# Altium PCB PCB_BLDC421232.PcbDoc
Units mm, origin at the board's own origin, x right, y up, seen from the top; angles counter-clockwise.
Board outline 115 x 85 mm, 2 copper layers (Top Layer, Bottom Layer), stack 1.671 mm thick; 81 components, 58 nets, 315 pads, 560 vias.
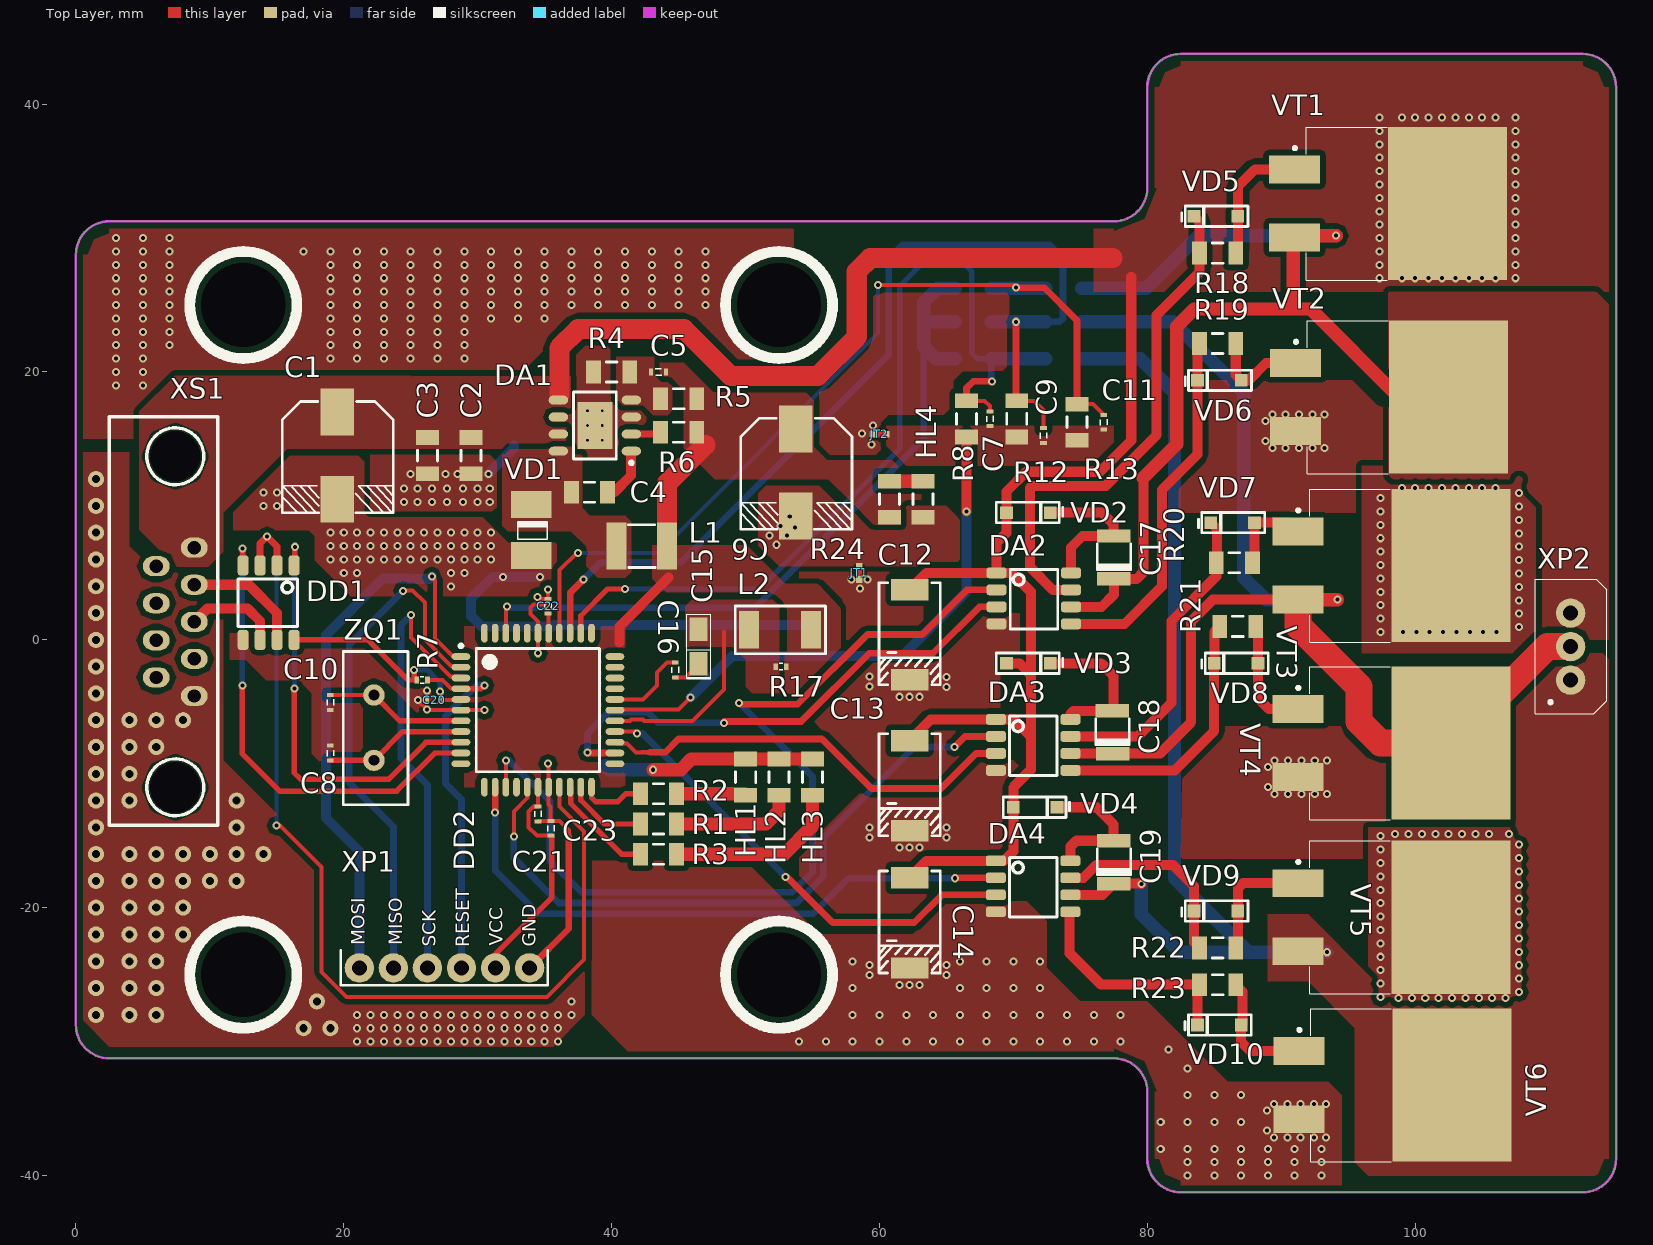
[diagram p0: Top Layer view]
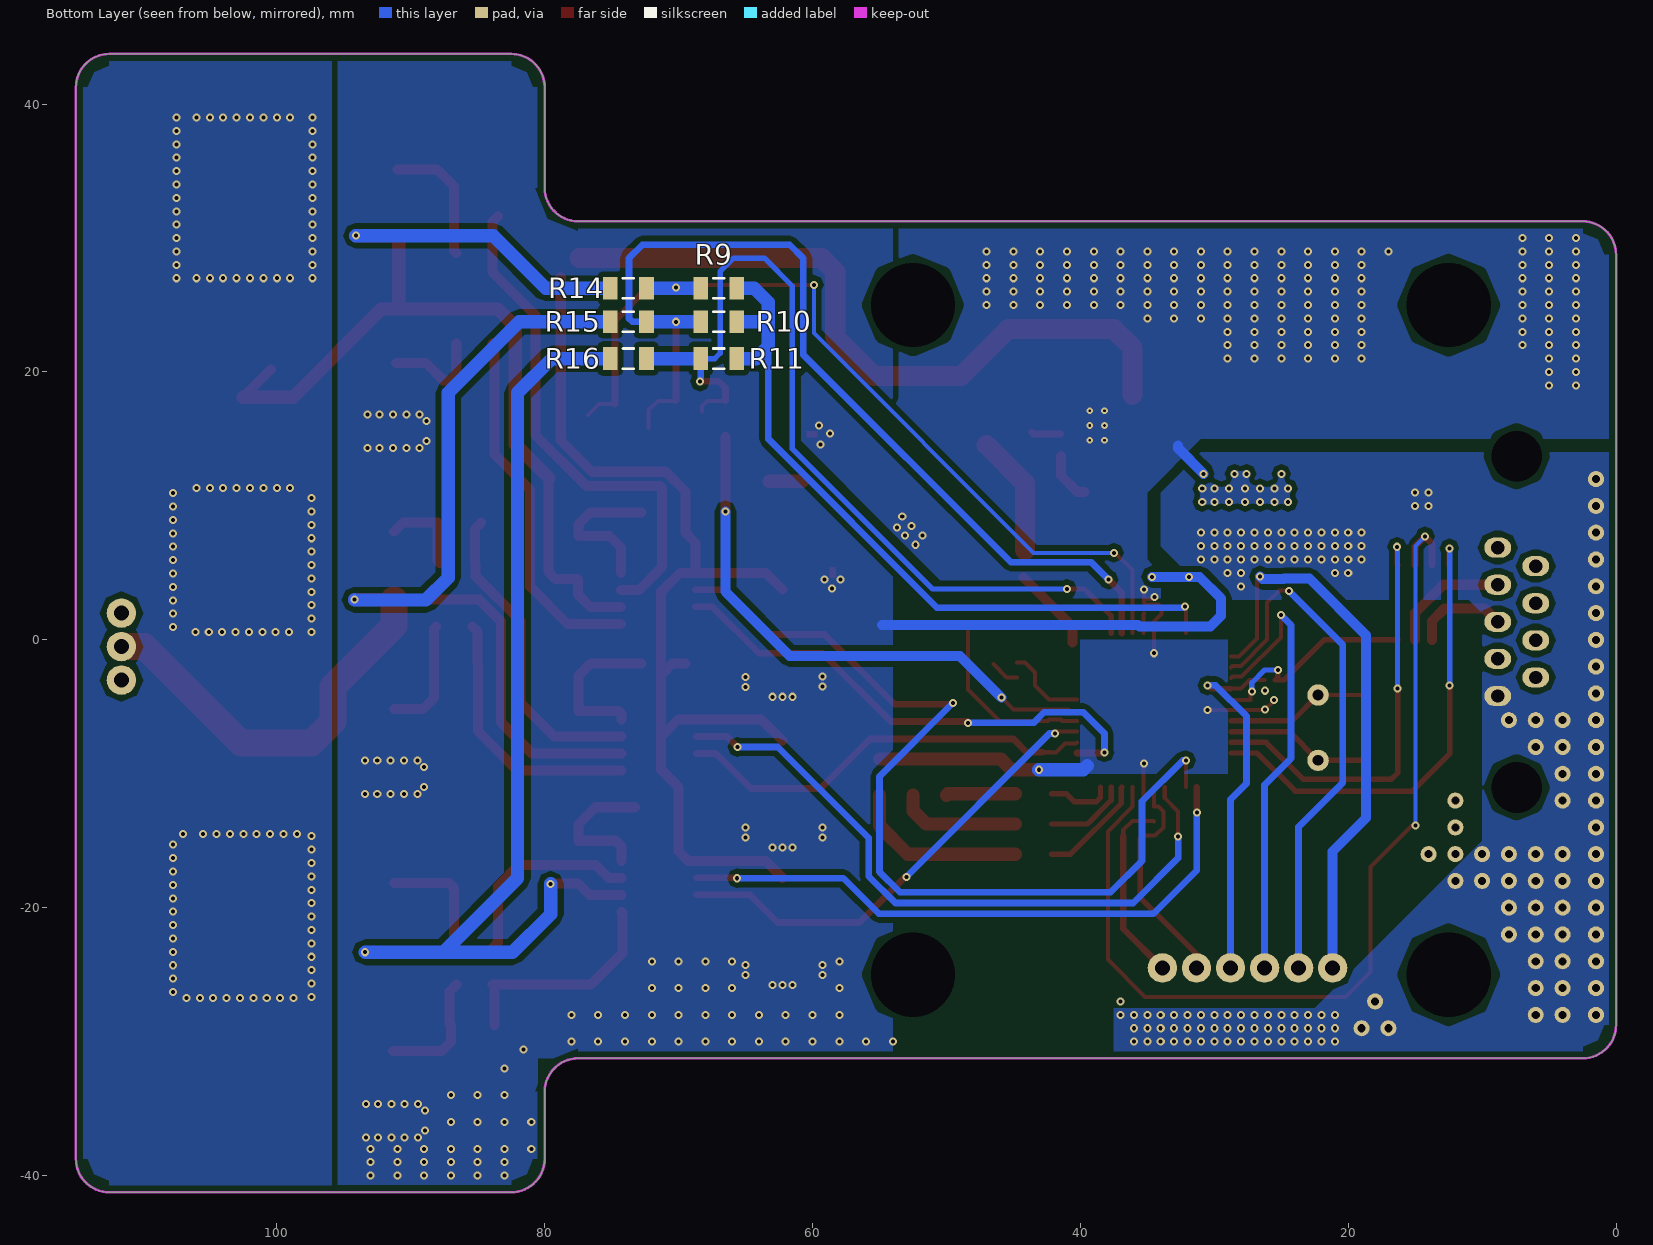
[diagram p1: Bottom Layer view, seen from below]

## Layer stack, top to bottom
Top Solder: solder mask 0.0102, Solder Resist, Dk 3.5
Top Layer: signal copper 0.0356
Dielectric 1: dielectric 1.6, FR-4, Dk 4.8
Bottom Layer: signal copper 0.0356
Bottom Solder: solder mask 0.0102, Solder Resist, Dk 3.5

## Board outline
2.5,-31.25 cw(c2.5,-28.75) 0,-28.75 0,28.75 cw(c2.5,28.75) 2.5,31.25 77.5,31.25 ccw(c77.5,33.75) 80,33.75 80,41.25 cw(c82.5,41.25) 82.5,43.75 112.5,43.75 cw(c112.5,41.25) 115,41.25 115,-38.75 cw(c112.5,-38.75) 112.5,-41.25 82.5,-41.25 cw(c82.5,-38.75) 80,-38.75 80,-33.75 ccw(c77.5,-33.75) 77.5,-31.25

## Design rules (kind name [scope] priority, off if disabled: settings)
Clearance [All] p1: gap=0.4 ignorepadtopadclearanceinfootprint=FALSE except(0.2: Arc-Via Track-Via SMDPad-Via THPad-Via Via-Via Fill-Poly; 0.3: Arc-Arc Arc-Track Arc-SMDPad Track-Track Track-SMDPad Track-THPad SMDPad-SMDPad THPad-THPad; 0.5: Arc-THPad Arc-Fill Arc-Text Track-Fill Track-Text SMDPad-THPad SMDPad-Fill SMDPad-Text THPad-Fill THPad-Text Via-Fill Via-Text Fill-Fill Fill-Text Poly-Text Region-Text Text-Text)
Clearance Clearance_KEEP [Keepout] p2: gap=0.75 ignorepadtopadclearanceinfootprint=FALSE except(0.2: Track-Track)
MatchedLengths MatchedLengths_SPI [InNetClass('SIGNAL_SPI')] p1: tolerance=2 checknetsindiffpair=FALSE checkdiffpairvsdiffpair=TRUE checkxsignals=TRUE checkothers=TRUE
PlaneClearance [All] p1: clearance=0.6
PlaneConnect [All] p1: planeconnectstyle=Relief reliefexpansion=0.5 reliefentries=4 reliefconductorwidth=0.4 reliefairgap=0.4
PolygonConnect [All] p1: connectstyle=Direct reliefconductorwidth=0.254 reliefentries=4 polygonreliefangle="90 Angle" airgapwidth=0.254
RoutingVias RoutingVias_basic [All] p1: holewidth=0.3 width=0.6 viastyle="Through Hole" minholewidth=0.3 minwidth=0.6 maxholewidth=0.3 maxwidth=0.6
SolderMaskExpansion [All] p1: expansion=0.05
Width [All] p1: maxlimit=10 minlimit=0.3 preferedwidth=0.5
28 further rules are at their usual default settings.

## Classes and differential pairs
net class SIGNAL_SPI: MISO MOSI SCK

## Components (designator, comment, footprint, x,y, rotation, side; value= is the part's Value field where it differs from the comment)
C1 "100u" ECAP_8x10 19.5,15.25 r270 top
C2 "68nF" CAP1206 29.5,13.75 r90 top
C3 "100nF" CAP1206 26.25,13.75 r90 top
C4 "100nF" CAP1206 38.35,11.025 r0 top
C5 "150pF" CAP0402_min 43.5,20 r0 top
C6 "100u" ECAP_8x10 53.75,14 r270 top
C7 "100nF" CAP0402_min 68.25,16.5 r90 top
C8 "22pF" CAP0402_min 19,-8.45 r270 top
C9 "100nF" CAP0402_min 72.25,15.25 r90 top
C10 "22pF" CAP0402_min 19,-4.675 r90 top
C11 "100nF" CAP0402_min 76.75,16.25 r90 top
C12 "10u" "Type D" 62.25,3.75 r270 top
C13 "10u" "Type D" 62.25,-7.519 r270 top
C14 "10u" "Type D" 62.25,-17.769 r270 top
C15 "10u" CAPTtantaltypeA 46.5,-0.5 r270 top
C16 "100nF" CAP0402_min 44.75,-2.25 r90 top
C17 "2.2u" "CAPASITOR TYPEB" 77.5,7.75 r270 top
C18 "2.2u" "CAPASITOR TYPEB" 77.4,-5.3 r270 top
C19 "2.2u" "CAPASITOR TYPEB" 77.5,-15 r270 top
C20 "100nF" CAP0402_min 26.75,-4.5 r0 top
C21 "100nF" CAP0402_min 34.5,-13 r90 top
C22 "100nF" CAP0402_min 35.25,2.5 r270 top
C23 "100nF" CAP0402_min 35.475,-14.075 r270 top
DA1 "ST1S14PHR" HSOP8_Termal 38.75,16 r180 top
DA2 "IR2101" SO-8 69.5,5 r0 top value=10-20VDC
DA3 "IR2101" SO-8 69.45,-5.94 r0 top value=10-20VDC
DA4 "IR2101" SO-8 69.45,-16.5 r0 top value=10-20VDC
DD1 "MAX483" SO-8 16.29,4.8 r270 top
DD2 "ATMega16" TQFP80P1200X1200X120-44N 34.5,-5.25 r0 top
HL1 "TO-1608BC-MRE" LED1206 50,-10.25 r90 top value=RED
HL2 "TO-1608BC-MRE" LED1206 52.5,-10.25 r90 top value=RED
HL3 "TO-1608BC-MRE" LED1206 55,-10.25 r90 top value=RED
HL4 "TO-1608BC-MRE" LED1206 63.25,10.5 r270 top value=RED
JT1 "JT" JT 58.5,4.5 r90 top net-tie
JT2 "JT" JT 59.5,15.344 r0 top net-tie
L1 "8.2u" LQH4N_1812 42.25,7 r0 top
L2 "220u" 453232 50.25,0.75 r0 top
R1 "680" 1206 43.5,-13.75 r180 top
R2 "680" 1206 43.5,-11.5 r180 top
R3 "680" 1206 43.5,-16 r180 top
R4 "1k" 1206 40,20 r0 top
R5 "3k" 1206 45,18 r0 top
R6 "3k" 1206 45,15.5 r0 top
R7 "1k2" 0402 26.25,-3 r180 top
R8 "10k" 1206 66.5,16.5 r90 top
R9 "4.7k" 1206 67,26.25 r0 bottom
R10 "4.7k" 1206 67,23.75 r0 bottom
R11 "4.7k" 1206 67,21 r0 bottom
R12 "10k" 1206 70.25,16.5 r90 top
R13 "10k" 1206 74.75,16.25 r90 top
R14 "4.7k" 1206 73.75,26.25 r0 bottom
R15 "4.7k" 1206 73.75,23.75 r0 bottom
R16 "4.7k" 1206 73.75,21 r0 bottom
R17 "2k" 0402 52.25,-2 r0 top
R18 "20" 1206 85.25,28.877 r0 top
R19 "20" 1206 85.25,22.127 r0 top
R20 "20" 1206 86.5,5.75 r0 top
R21 "20" 1206 86.75,1 r0 top
R22 "20" 1206 85.25,-23 r0 top
R23 "20" 1206 85.25,-25.75 r0 top
R24 "200" 1206 60.75,10.5 r270 top
VD1 "SS16" DO-214(SMA) 34,6.3 r90 top value=1A,60V
VD2 "1N4148" SOD-23 70,9.5 r0 top value="100V 150mA"
VD3 "1N4148" SOD-23 70,-1.75 r0 top value="100V 150mA"
VD4 "1N4148" SOD-23 70.5,-12.5 r0 top value="100V 150mA"
VD5 "1N4148" SOD-23 86.25,31.627 r180 top value="100V 150mA"
VD6 "1N4148" SOD-23 86.508,19.377 r180 top value="100V 150mA"
VD7 "1N4148" SOD-23 87.5,8.75 r180 top value="100V 150mA"
VD8 "1N4148" SOD-23 87.75,-1.75 r180 top value="100V 150mA"
VD9 "1N4148" SOD-23 86.25,-20.25 r180 top value="100V 150mA"
VD10 "1N4148" SOD-23 86.5,-28.75 r180 top value="100V 150mA"
VT1 "IPD100N06S4-03" D2PACK 102.42,32.587 r270 top value="100А, 60В"
VT2 "IPD100N06S4-03" D2PACK 102.5,18.127 r270 top value="100А, 60В"
VT3 "IPD100N06S4-03" D2PACK 102.67,5.54 r270 top value="100А, 60В"
VT4 "IPD100N06S4-03" D2PACK 102.67,-7.71 r270 top value="100А, 60В"
VT5 "IPD100N06S4-03" D2PACK 102.67,-20.71 r270 top value="100А, 60В"
VT6 "IPD100N06S4-03" D2PACK 102.75,-33.25 r270 top value="100А, 60В"
XP1 "DS1021-1*6SF11-B" PLS6x1 21.17,-24.5 r0 top value=500VAC
XP2 "CWF-3R" CWF-3R 111.6,-3 r90 top
XS1 "DRB-09FA" DRB-09FA 8.84,1.345 r270 top value=250V,1.5A
ZQ1 "8MHz" HC-49US 22.25,-9 r90 top

## Footprints (in the part's own frame and the unit in brackets; to place one, negate y for a bottom-side part, rotate by r counter-clockwise, add the part's x,y. Pads: shape width x height; smd on the part's side, far side on the other; paste and mask are expansions set on the pad)
0402 [mm]
  rect 0.35x0.5 smd mask+0.07: 1(0,0) 2(0.8,0)
  silkscreen extent 0.25,-0.25 0.54,0.25, body extent -0.1,-0.25 0.9,0.25, height 0.25
1206 [mm]
  rect 1.1x1.7 smd: 1(-1.35,0) 2(1.35,0)
  silkscreen extent -0.4,-0.75 0.4,0.75, body extent -1.55,-0.83 1.55,0.83, height 0.67
453232 [mm]
  rect 1.5x2.8 smd: 1(0,0) 2(4.639,0)
  silkscreen extent -1.02,-1.78 5.71,1.78, body extent -0.04,-1.65 4.61,1.55, height 3.05
CAP0402_min [mm]
  rect 0.3x0.5 smd mask+0.07: 1(-0.55,0) 2(0.55,0)
  silkscreen extent -0.23,-0.25 0.23,0.25, body extent -0.73,-0.25 0.73,0.25, height 0.51
CAP1206 [mm]
  rect 1.1x1.7 smd: 1(-1.35,0) 2(1.35,0)
  silkscreen extent -0.4,-0.75 0.4,0.75, body extent -1.6,-0.8 1.6,0.8, height 1.25
"CAPASITOR TYPEB" [mm]
  rect 1x2.5 smd: 1(0,-0.025) 2(3.2,0)
  silkscreen extent 0.6,-1.25 2.63,1.25, body extent -0.17,-1.42 3.32,1.37, height 1.91
CAPTtantaltypeA [mm] "Molded Capacitor, 2-Leads, Body 3,20x1,60mm, IPC Medium Density"
  rect 1.75x1.35 smd: 1(-1.3,0) 2(1.3,0)
  silkscreen extent -2.41,-0.89 2.41,0.89, body extent -1.6,-0.8 1.6,0.8, height 1.61
CWF-3R [mm]
  round 2.2 hole 1.1: 1(5,0) 2(2.5,0) 3(0,0)
  silkscreen extent -2.52,-2.7 7.53,2.65, body extent -2.5,-8.88 7.5,2.62, height 5.75
D2PACK [mm]
  rect 2.08x3.81 smd: 1(-2.54,-11.42) 3(2.54,-11.42)
  rect 11.43x8.89 smd: 2(0,0)
  silkscreen extent -5.7,-11.5 5.73,-4.52, body extent -5.05,-11.49 5.11,3.77, height 4.88
DO-214(SMA) [mm]
  rect 2x3 smd: 1(0,0) 2(3.8,0)
  silkscreen extent 1.2,-1.2 2.5,1, body extent -0.7,-1.3 4.5,1.3, height 2.5
DRB-09FA [mm]
  oval 1.5x2 hole 1: 1(-5.54,0) 2(-4.155,-2.84) 3(-2.77,0) 4(-1.385,-2.84) 5(0,0) 6(1.385,-2.84) 7(2.77,0) 8(4.155,-2.84) 9(5.54,0)
  round 0 hole 3.8: M(-12.36,-1.42) M(12.36,-1.42)
  silkscreen extent -15.3,-6.35 15.2,1.75, body extent -15.3,-14.95 15.2,1.75, height 12.55
ECAP_8x10 [mm] "8x10mm"
  rect 3.5x2.5 smd: 1(-1.75,0) 2(4.75,0)
  silkscreen extent -2.55,-4.1 5.8,4.2, body extent -2.55,-4.17 5.75,4.12, height 10.55
HC-49US [mm]
  round 1.6 hole 0.8: 1(0,0) 3(4.88,0)
  silkscreen extent -3.3,-2.54 8.13,2.29, body extent -3.26,-2.41 8.09,2.24, height 3.6
HSOP8_Termal [mm] "SOP, 8-Leads, Body 4,90x3,90mm, Pitch 1,27mm, Thermal Pad 3,50x2,60mm, IPC Medium Density"
  oval 1.45x0.65 smd: 1(-2.725,1.905) 2(-2.725,0.635) 3(-2.725,-0.635) 4(-2.725,-1.905) 5(2.725,-1.905) 6(2.725,-0.635) 7(2.725,0.635) 8(2.725,1.905)
  rect 2.6x3.5 smd: 9(0,0)
  silkscreen extent -2.85,-2.5 1.6,2.9, body extent -3.1,-2.5 3.1,2.5, height 1.75
JT [mm]
  rect 0.5x0.5 smd mask+0: 1(0,0) 2(1,0)
  Top Layer region: 0.125,-0.25 0.95,-0.25 0.95,0.25 0.125,0.25
LED1206 [mm]
  rect 1.1x1.7 smd: 1(-1.35,0) 2(1.35,0)
  silkscreen extent -0.4,-0.75 0.4,0.75, body extent -1.6,-0.8 1.6,0.8, height 1.1
LQH4N_1812 [mm]
  rect 1.5x3.5 smd: 1(-1.9,0) 2(1.9,0)
  silkscreen extent -1,-1.6 1,1.6, body extent -2.3,-1.6 2.3,1.6, height 2.6
PLS6x1 [mm] "Programmer AVR"
  round 2.2 hole 1.1: 1(0,0) 2(2.54,0) 3(5.08,0) 4(7.62,0) 5(10.16,0) 6(12.7,0)
  silkscreen extent -1.4,-1.3 14.05,1.3, body extent -1.24,-1.3 14,1.24, height 8.54
SO-8 [mm]
  rrect50% 1.505x0.802 smd: 1(-0.762,0) 2(-0.762,-1.27) 3(-0.762,-2.54) 4(-0.762,-3.81) 5(4.8,-3.81) 6(4.8,-2.54) 7(4.8,-1.27) 8(4.8,0)
  silkscreen extent 0.25,-4.19 3.81,0.25, body extent -0.86,-4.39 4.92,0.51, height 1.45
SOD-23 [mm]
  rect 0.95x0.95 smd: 1(-0.508,0) 2(2.758,0)
  silkscreen extent -1.27,-0.76 3.68,0.76, body extent -0.71,-0.8 2.99,0.8, height 1.27
TQFP80P1200X1200X120-44N [mm] "TQFP, 44-Leads, Body 10,00x10,00mm, Pitch 0,80mm, IPC Medium Density"
  oval 1.4x0.5 smd: 1(-5.75,4) 2(-5.75,3.2) 3(-5.75,2.4) 4(-5.75,1.6) 5(-5.75,0.8) 6(-5.75,0) 7(-5.75,-0.8) 8(-5.75,-1.6) 9(-5.75,-2.4) 10(-5.75,-3.2) 11(-5.75,-4) 23(5.75,-4) 24(5.75,-3.2) 25(5.75,-2.4) 26(5.75,-1.6) 27(5.75,-0.8) 28(5.75,0) 29(5.75,0.8) 30(5.75,1.6) 31(5.75,2.4) 32(5.75,3.2) 33(5.75,4)
  oval 0.5x1.4 smd: 12(-4,-5.75) 13(-3.2,-5.75) 14(-2.4,-5.75) 15(-1.6,-5.75) 16(-0.8,-5.75) 17(0,-5.75) 18(0.8,-5.75) 19(1.6,-5.75) 20(2.4,-5.75) 21(3.2,-5.75) 22(4,-5.75) 34(4,5.75) 35(3.2,5.75) 36(2.4,5.75) 37(1.6,5.75) 38(0.8,5.75) 39(0,5.75) 40(-0.8,5.75) 41(-1.6,5.75) 42(-2.4,5.75) 43(-3.2,5.75) 44(-4,5.75)
  silkscreen extent -5.87,-4.6 4.6,4.92, body extent -6,-5.97 6,6.03, height 1.1
"Type D" [mm]
  rect 1.6x2.8 smd: 1(0,0) 2(6.731,0)
  silkscreen extent -0.51,-2.29 7.11,2.29, body extent -0.37,-2.29 7.23,2.31, height 3.1

## Part data
C1 C6: library part "Capasitor Electrolit", Manufacturer=Epcos, Package=ECAP8x10, Part Namber=B41121A6107M000, Power=50V, Price=0,09, Quantity=50, ShoppingPlace=https://www.ru-chipdip.by/product/b41121a6107m000
C2: library part Capasitor, Manufacturer=Murata, Package=1206, Part Number=GRM31C5C1H683JA01L, Voltage=100V, Price=0,6, Quantity=20, ShoppingPlace=https://www.ru-chipdip.by/product/grm31c5c1h683ja01l
C3 C4: library part Capasitor, Manufacturer=Murata, Package=1206, Part Number=GRM31CR72A104KW03L, Voltage=100V, Price=0,6, Quantity=20, ShoppingPlace=https://www.ru-chipdip.by/product/grm31cr72a104k
C5: library part Capasitor, Manufacturer=Murata, Package=0402, Part Number=GRM1555C1H151JA01D, Voltage=50V, Price=0,02, Quantity=50, ShoppingPlace=https://www.ru-chipdip.by/product/grm1555c1h151j
C7 C9 C11 C16 C20 C21 C22 C23: library part Capasitor, Manufacturer=Murata, Package=0402, Part Number=GRM155R71C104KA88B, Voltage=16V, Price=0,025, Quantity=100, ShoppingPlace=https://www.ru-chipdip.by/product/grm155r71c104k
C8 C10: library part Capasitor, Manufacturer=Samsung, Package=0402, Part Number=CL05C220JB5NNNC, Voltage=50V, Price=0,15, Quantity=20, ShoppingPlace=http://belchip.by/product/?selected_product=18843
C12 C13 C14: library part "Capasitor Electrolit", Manufacturer=Китай, Package=TypeD, Part Namber=TECAP10/25VD20, Power=25V, Price=0,5, ShoppingPlace=https://www.ru-chipdip.by/product0/917720288
C15: library part "Capasitor Electrolit", Manufacturer=Китай, Package=TypeA, Part Namber=TECAP10/10VA10, Power=10V, Price=0,13, Quantity=20, ShoppingPlace=https://www.ru-chipdip.by/product0/868717967
C17 C18 C19: library part "Capasitor Electrolit", Manufacturer=China, Package="Type B", Part Namber=TECAP2.2/25VB20, Power=25V, Price=0,19, Quantity=20, ShoppingPlace=https://www.ru-chipdip.by/product0/27589
DA1: Manufacturer="STM MicroElectronics", Package=HSOP8, Documentation=http://docs-europe.electrocomponents.com/webdocs/133a/0900766b8133a6fb.pdf, Part Number=ST1S14PHR, Price=2,95, Quantity=1, ShoppingPlace=https://www.ru-chipdip.by/product/st1s14phr
DA2 DA3 DA4: Manufacture="Internation Rectifier", Package=SO-8, Part Number=IR2101SPBF, Documentation=https://www.infineon.com/dgdl/ir2101.pdf?fileId=5546d462533600a4015355c7a755166c, Price=0,8, Quantity=15, ShoppingPlace=https://www.ru-chipdip.by/product/ir2101s
DD1: Manufacture="Maxim Integreted", Package=SO-8, Part Number=MAX483, ShoppingPlace=http://belchip.by/product/?selected_product=29121
DD2: library part "ATMega 16", Manufacturer=ATmel, Documentation=http://ww1.microchip.com/downloads/en/DeviceDoc/doc2466.pdf, Part Number=ATMega16, Price=12, Quantity=1
HL1 HL2 HL3 HL4: library part LED, Manufacturer="Taiwan Oasis Technology Co.,", Package=1206, Part Number=TO-1608BC-MRE, Price=0,06, Quantity=20, Shopping Place=https://www.ru-chipdip.by/product/to-1608bc-mre
L1: library part Inductor, Manufacturer="Murata Manufacturing", Package=1812, Part Number=LQH4N8R2K04, Documentation=https://static.chipdip.ru/lib/052/DOC000052641.pdf, Price=0.3, Quantity=6, ShoppingPlace=https://www.ru-chipdip.by/product/lqh4n8r2k04
L2: library part Inductor, Manufacturer=Bourns, Package=1812, Part Number=CM453232-221KL, Price=0.225, Quantity=2, ShoppingPlace=https://www.ru-chipdip.by/product/cm453232-221kl
R1 R2 R3: library part Resistor, Manufacturer=Тайвань, Package=1206, Part Number=RC1206FR-07200RL, Power=0.25W, Price=0,015, Quntity=59, ShoppingPlace=https://www.ru-chipdip.by/product0/9000079898
R4: library part Resistor, Manufacturer="Taiwan Co", Package=1206, Part Number=RC1206FR-071KL, Power=0.25W, Price=0,015, Quntity=50, ShoppingPlace=https://www.ru-chipdip.by/product0/9000079635
R5 R6: library part Resistor, Manufacturer="Taiwan Co", Package=1206, Part Number=RC1206FR-073KL, Power=0.25W, Price=0,015, Quntity=50, ShoppingPlace=https://www.ru-chipdip.by/product0/9000079646
R7: library part Resistor, Manufacturer=YAGEO, Package=0402, Part Number=RC04021k2, Power=0,063W, Price=0,15, Quntity=1, ShoppingPlace=http://belchip.by/product/?selected_product=32518
R8 R12 R13: library part Resistor, Manufacturer="Taiwan Co", Package=1206, Part Number=RC1206JR-0710KL, Power=0.25W, Price=0,015, Quntity=60, ShoppingPlace=https://www.ru-chipdip.by/product0/179631946
R9 R10 R11 R14 R15 R16: library part Resistor, Manufacturer="Taiwan Co", Package=1206, Part Number=RC1206FR-074K7L, Power=0.25W, Price=0,015, Quntity=60, ShoppingPlace=https://www.ru-chipdip.by/product0/9000079651
R17: library part Resistor, Manufacturer=Тайвань, Package=0402, Part Number=RC0402FR-072KL, Power=0,063W, Price=0,015, Quntity=100, ShoppingPlace=https://www.ru-chipdip.by/product0/9000189809
R18 R19 R20 R21 R22 R23: library part Resistor, Manufacturer="Taivan CO", Package=1206, Part Number=RC1206FR-0720RL, Power=0,25W, Price=0,015, Quntity=100, ShoppingPlace=https://www.ru-chipdip.by/product0/9000079866
R24: library part Resistor, Manufacturer=Тайвань, Package=1206, Part Number=RC1206FR-07680RL, Power=0.25W, Price=0,015, Quntity=59, ShoppingPlace=https://www.ru-chipdip.by/product0/9000079631
VD1: library part Basic_Diode_shottki, Manufacturer=MIC, Package=SMA, Documantation=http://belchip.by/sitedocs/ss10.pdf, Part Number=SS16, Price=0,05, Quantity=1, ShoppingPlace=http://belchip.by/product/?selected_product=30374
VD2 VD3 VD4 VD5 VD6 VD7 VD8 VD9 VD10: library part Basic_Diode, Package=SOD-123, Documantation=https://static.chipdip.ru/lib/008/DOC003008077.pdf, Part Number=1N4148, Price=0,035, Quantity=10, ShoppingPlace=https://www.ru-chipdip.by/product/1n4148w-5
VT1 VT2 VT3 VT4 VT5 VT6: Manufacturer=Infinion, Package=D2PАK, Documentation=https://ru.mouser.com/datasheet/2/196/Infineon-IPD100N06S4_03-DS-v01_00-en-1227019.pdf, Part Number=IPD100N06S4-03, Price=1.5, Quantity=1, ShoppingPlace=http://belchip.by/product/?selected_product=33940
XP1: library part "AVR Connector Programmer", Manufacturer=ROhs, Package=6SF11-B, Documentation=https://static.chipdip.ru/lib/227/DOC000227157.pdf, Part Number=DS1021-1*6SF11-B, Price=0,09, Quantity=20, ShoppingPlace=https://www.ru-chipdip.by/product/pls-6?from=suggest_product
XP2 XS1: Manufacturer=KLS
  XP2: Package=CWF-3R, Part Number=CWF-3R, Price=0.05, Quantity=3, ShoppingPlace=http://belchip.by/product/?selected_product=32444
  XS1: Documentation=http://belchip.by/sitedocs/00003408.pdf, Part Number=DRB-09FA, Price=0,35, Quantity=1, ShoppingPlace=http://belchip.by/product/?selected_product=03408
ZQ1: library part Rzanator, Manufacturer=CHina, Package=HC-49US, Part Number=8.000MHzHC-49US, Price=0,15, Quantity=7, ShoppingPlace=https://www.ru-chipdip.by/product/8mhz-hc-49s

## Free pads (board coordinates)
  round 1.2 hole 0.6: -(1.5,-28) -(1.5,-26) -(1.5,-24) -(1.5,-22) -(1.5,-20) -(1.5,-18) -(1.5,-16) -(1.5,-14) -(1.5,-12) -(1.5,-10) -(1.5,-8) -(1.5,-6) -(1.5,-4) -(1.5,-2) -(1.5,0) -(1.5,2) -(1.5,4) -(1.5,6) -(1.5,8) -(1.5,10) -(1.5,12) -(4,-28) -(4,-26) -(4,-24) -(4,-22) -(4,-20) -(4,-18) -(4,-16) -(4,-12) -(4,-10) -(4,-8) -(4,-6) -(6,-28) -(6,-26) -(6,-24) -(6,-22) -(6,-20) -(6,-18) -(6,-16) -(6,-8) -(6,-6) -(8,-22) -(8,-20) -(8,-18) -(8,-16) -(8,-6) -(10,-18) -(10,-16) -(12,-18) -(12,-16) -(12,-14) -(12,-12) -(14,-16) -(17,-29) -(18,-27) -(19,-29)
  round 0 hole 6.3: -(12.5,-25) -(12.5,25) -(52.5,-25) -(52.5,25)

## Via types
v1: diameter 0.6, hole 0.3, Top Layer to Bottom Layer, 504 vias
v2: diameter 0.6, hole 0.3, Top Layer to Bottom Layer, tented both sides, 50 vias
v3: diameter 0.5, hole 0.2, Top Layer to Bottom Layer, 6 vias

## Nets (pads, with @x,y where several pads share a name; then routed paths per layer and width w, separated by ;. In a path a pad name is that pad's centre, name@x,y a point inside that pad or via, vN(x,y) a via of type N, cw(c..) or ccw(c..) an arc to the next point about the centre after c; other vN are vias at no path point)
5V_VCC: C5.2 C6.1 C20.2 C21.2 C22.2 C23.2 DD1.8 DD2.5 DD2.17 DD2.38 L1.2 L2.2 R5.2 R6.2 R7.2 R17.2 R24.2 XP1.5 | length 50.1
  Top Layer w0.3: v1(27.201,-3.85) 27.3,-3.949 C20.2 28.7,-4.5 DD2.5 ; DD2.17 C21.2 34.15,-12.45 33.8,-12.8 33.8,-14 34.425,-14.625 C23.2 ; C22.2 35.3,1.9 DD2.38
  Top Layer w0.4: DD1.8 21.8,0 24.8,-3 R7.2 25.25,-2.8 v1(25.25,-2.25) ; XP1.5 31.33,-23.47 35.525,-19.275 35.525,-14.805
  Top Layer w0.75: 40.6,-0.2 40.6,1 44.25,4.65
  Top Layer w1.5: L1.2@44.15,6.7 L1.2 44.15,11.7 47,14.55
  Bottom Layer w0.4: v1(25.25,-2.25) 26.25,-2.25 27.201,-3.201 v1(27.201,-3.85)
A_DATA: DD1.6 XS1.5 | length 7.1
  Top Layer w0.75: XS1.5 9.845,2.35 12.8,2.35 13.75,1.4 DD1.6
ADC_0: C11.2 DD2.37 R9.2 R13.2 R14.1 | length 68
  Top Layer w0.3: DD2.37 36.1,5.2 37.4,6.5 v1(37.5,6.5) ; v1(59.9,26.5) 70,26.5 v1(70.2,26.3) ; R13.2 75.95,17.6 C11.2
  Top Layer w0.5: v1(70.2,26.3) 72.3,26.3 74.75,23.85 R13.2
  Bottom Layer w0.3: v1(37.5,6.5) 43.5,6.5 59.9,22.9 v1(59.9,26.5)
  Bottom Layer w1: R9.2 R14.1
ADC_1: C9.2 DD2.36 R10.2 R12.2 R15.1 | length 74.7
  Top Layer w0.3: R12.2 71.55,17.85 72.25,17.15 C9.2
  Top Layer w0.5: DD2.36 36.9,3.5 v1(37.9,4.5) ; v1(70.2,23.75) 70.2,17.9 R12.2
  Bottom Layer w0.5: v1(37.9,4.5) 39.2,5.8 45.2,5.8 60.7,21.3 60.7,28.5 61.7,29.5 72.7,29.5 73.7,28.5 73.7,24 73.45,23.75 R15.1
  Bottom Layer w1: R10.2 v1(70.2,23.75) R15.1
ADC_2: C7.2 DD2.35 R8.2 R11.2 R16.1 | length 67.9
  Top Layer w0.3: R8.2 67.85,17.85 68.25,17.45 C7.2
  Top Layer w0.4: DD2.35 37.7,1.8 39.7,3.8 v1(41,3.8)
  Top Layer w0.5: R8.2 66.5,18.8 67,19.3 v1(68.4,19.3)
  Bottom Layer w0.4: v1(41,3.8) 51.039,3.8 61.5,14.261 61.5,26.4 63.6,28.5 65.9,28.5 66.9,27.5 66.9,21.4 67.3,21 R11.2
  Bottom Layer w0.5: R11.2 68.35,19.35 v1(68.4,19.3)
  Bottom Layer w1: R11.2 R16.1
AGND: C7.1 C9.1 C11.1 DD2.28 JT2.2 R8.1 R12.1 R13.1 | length 40.8
  Top Layer w0.3: DD2.28@40.9,-5.2 45,-5.2 v1(45.9,-4.3)
  Top Layer w0.75: v1(66.5,9.6) R8.1
  Bottom Layer w0.75: v1(45.9,-4.3) 49,-1.2 61.7,-1.2 66.5,3.6 v1(66.5,9.6)
AIN0: DD2.42 R9.1 R10.1 R11.1 | length 56.3
  Top Layer w0.3: DD2.42 32.1,2.4 v1(32.2,2.5)
  Bottom Layer w0.5: v1@32.3,2.4 50.7,2.4 63.3,15 63.3,21.9
  Bottom Layer w1: R11.1 64.2,21 63.3,21.9 63.3,23.75 ; R10.1 63.3,23.75 ; R9.1 64.35,26.25 63.3,25.2 63.3,23.75
AREF: C16.2 DD2.29 | length 6.2
  Top Layer w0.3: DD2.29 42.35,-4.45 43.4,-3.4 43.4,-2.425 44.125,-1.7 C16.2
AVCC: C15.1 DD2.27 L2.1 R17.1 | length 13.5
  Top Layer w0.3: DD2.27 41.365,-6.05 41.465,-5.95 42.335,-5.95 42.435,-6.05 46.05,-6.05 48.4,-3.7 48.4,0.6
B_DATA: DD1.7 XS1.3 | length 9.1
  Top Layer w0.75: XS1.3 12.91,4.115 15.02,2.005 DD1.7
DATA_TRANSMIT: DD2.22 R2.2 | length 4.8
  Top Layer w0.4: DD2.22 38.5,-11.785 38.815,-12.1 40.45,-12.1 41.05,-11.5 R2.2
DGND: C2.1 C3.1 C6.2 C8.1 C10.1 C20.1 C21.1 C22.1 C23.1 DA1.3 DA1.6 DA1.9 DD1.5 DD2.6 DD2.18 DD2.39 HL1.2 HL2.2 HL3.2 HL4.2 JT1.2 JT2.1 R4.1 XP1.6 | length 49.5
  Top Layer w0.3: v1(25.55,-4.5) 25.55,-4.55 v1(26.2,-5.2) 26.25,-5.25 DD2.6 v1(30.5,-5.25) ; v1(34.45,3.2) 34.5,3.2 34.65,3.05 C22.1 ; C21.1 34.525,-13.525 C23.1 ; v1(34.5,-1) DD2.39 34.5,1.375 33.95,1.925 33.95,2.425 34.15,2.625 35.075,2.625 35.25,2.8 C22.1 ; v1(35.25,-9.25) 35.3,-9.3 DD2.18 35.3,-12.3 35.45,-12.45 35.45,-13.5 C23.1 ; v1(35.25,3.75) C22.1 ; 36.8,-14.7 36.8,-14.2 36.125,-13.525 C23.1
  Top Layer w0.5: XP1.6 36.8,-21.57 36.8,-14.7
  Top Layer w1: v1(43.1,-9.7) 45.15,-9.7 45.95,-8.9 HL1.2 HL2.2 HL3.2
  Bottom Layer w0.75: v1(30.8,12.4) 32.7,14.3 32.7,14.5
  Bottom Layer w1: 39.5,-9.4 39.8,-9.7 v1(43.1,-9.7)
  other v1: 26.2,-3.8 52.3,7.1 51.8,7.8 53.1,7.8 53.7,8.4 52.6,8.5 53.3,9.2 24.5,10.3 25.5,10.3 26.6,10.3 27.7,10.3 28.9,10.3 30,10.3 30.9,10.3 24.5,11.3 25.5,11.3 26.6,11.3 27.7,11.3 28.9,11.3 30,11.3 30.9,11.3 25,12.4 27.6,12.4 28.484,12.4 59.4,14.6 58.7,15.4 59.5,16 3,19 5,19 3,20 5,20 3,21 5,21 19,21 21,21 23,21 25,21 27,21 29,21 3,22 5,22 7,22 19,22 21,22 23,22 25,22 27,22 29,22 3,23 5,23 7,23 19,23 21,23 23,23 25,23 27,23 29,23 3,24 5,24 7,24 19,24 21,24 23,24 25,24 27,24 27,24 29,24 31,24 33,24 35,24 3,25 5,25 7,25 19,25 21,25 23,25 25,25 27,25 29,25 31,25 33,25 35,25 37,25 39,25 41,25 43,25 45,25 47,25 3,26 5,26 7,26 19,26 21,26 23,26 25,26 27,26 29,26 31,26 33,26 35,26 37,26 39,26 41,26 43,26 45,26 47,26 3,27 5,27 7,27 19,27 21,27 23,27 25,27 27,27 29,27 31,27 33,27 35,27 37,27 39,27 41,27 43,27 45,27 47,27 3,28 5,28 7,28 19,28 21,28 23,28 25,28 27,28 29,28 31,28 33,28 35,28 37,28 39,28 41,28 43,28 45,28 47,28 3,29 5,29 7,29 17,29 19,29 21,29 23,29 25,29 27,29 29,29 31,29 33,29 35,29 37,29 39,29 41,29 43,29 45,29 47,29 3,30 5,30 7,30
  other v3: 38.2,14.9 39.3,14.9 38.2,16 39.3,16 38.2,17.1 39.3,17.1
HIN1: DA2.2 DD2.14 | length 69.9
  Top Layer w0.3: DD2.14 v1(32.1,-9)
  Top Layer w0.5: v1(49.5,-4.7) 49.6,-4.8 53.9,-4.8 59.1,0.4 63.2,0.4 66.53,3.73 DA2.2
  Bottom Layer w0.5: v1(32.1,-9) 32.35,-9 35.4,-12.05 35.4,-16.5 37.75,-18.85 53.476,-18.85 55,-17.326 55,-10.2 v1(49.5,-4.7)
HIN2: DA3.2 DD2.16 | length 49.9
  Top Layer w0.3: v1(32.7,-14.7) 32.7,-12.8 33.7,-11.8 DD2.16
  Top Layer w0.5: v1(65.6,-8) 66.39,-7.21 DA3.2
  Bottom Layer w0.5: v1(32.7,-14.7) 32.7,-16.3 36.05,-19.65 53.808,-19.65 55.8,-17.658 55.8,-14.8 62.6,-8 v1(65.6,-8)
HIN3: DA4.2 DD2.13 | length 46
  Top Layer w0.5: v1(31.3,-12.9) DD2.13 ; v1(65.64,-17.8) 65.67,-17.77 DA4.2
  Bottom Layer w0.5: v1(31.3,-12.9) 31.3,-17.2 34.55,-20.45 55.05,-20.45 57.7,-17.8 v1(65.64,-17.8)
HO_1: DA2.7 R18.1 VD5.2 | length 38.6
  Top Layer w0.75: DA2.7 72.945,3.73 71.225,5.45 71.225,11.325 71.4,11.5 76.9,11.5 80.7,15.3 80.7,24.25 83.9,27.45 R18.1 83.9,31.219 VD5.2
HO_2: DA3.7 R20.1 VD7.2 | length 23.6
  Top Layer w0.75: DA3.7 79.29,-7.21 81.8,-4.7 81.8,1.4 85.15,4.75 R20.1 85.2,5.8 85.2,8.292 VD7.2
HO_3: DA4.7 R22.1 VD9.2 | length 15.1
  Top Layer w0.75: DA4.7 75.225,-17.77 76.195,-16.8 81.9,-16.8 83.492,-18.392 VD9.2 83.5,-20.258 83.5,-22.6 R22.1
LED_ON_MPU: DD2.20 R3.2 | length 8
  Top Layer w0.4: DD2.20 36.95,-11.05 36.95,-12.215 40.735,-16 R3.2
LED_REVERSE: DD2.21 R1.2 | length 6.2
  Top Layer w0.4: DD2.21 37.7,-11.975 39.475,-13.75 R1.2
LIN1: DA2.3 DD2.24 | length 38.6
  Top Layer w0.5: v1(38.2,-8.4) 38.25,-8.45 DD2.24 ; v1(48.4,-6.2) 48.4,-6.1 54.15,-6.1 59.25,-1 64,-1 67.46,2.46 DA2.3
  Bottom Layer w0.5: v1(38.2,-8.4) 38.2,-7 39.8,-5.4 42.7,-5.4 43.5,-6.2 v1(48.4,-6.2)
LIN2: DA3.3 DD2.25 | length 31.8
  Top Layer w0.3: DD2.25 40.35,-7.75 41.165,-7.75 41.815,-8.4 42.9,-8.4
  Top Layer w0.5: 42.9,-8.4 44,-8.4 45,-7.4 55.7,-7.4 59.4,-11.1 64.6,-11.1 67.22,-8.48 DA3.3
LIN3: DA4.3 DD2.26 | length 35.2
  Top Layer w0.3: DD2.26 41.75,-6.85 v1(41.9,-7)
  Top Layer w0.5: v1(53,-17.7) 53.1,-17.7 56.5,-21.1 62.6,-21.1 64.66,-19.04 DA4.3
  Bottom Layer w0.5: v1(41.9,-7) 42.3,-7 v1(53,-17.7)
LO_1: DA2.5 R19.1 VD6.2 | length 27.3
  Top Layer w0.75: DA2.5 78.29,1.19 81.1,4 81.1,11.2 83.75,13.85 VD6.2 83.75,21.977 R19.1
LO_2: DA3.5 R21.1 VD8.2 | length 19.9
  Top Layer w0.75: DA3.5 82.05,-9.75 84.992,-6.808 VD8.2 85,-1.742 85,0.6 R21.1
LO_3: DA4.5 R23.1 VD10.2 | length 16.8
  Top Layer w0.75: DA4.5 74.2,-20.36 74.2,-23.4 76.55,-25.75 R23.1 83.742,-25.908 VD10.2
MISO: DD2.2 XP1.2 | length 39.6
  Top Layer w0.3: v1(24.425,3.65) 24.475,3.7 25.15,3.7 26.05,2.8 26.05,0.01 28.01,-1.95 28.65,-1.95 DD2.2
  Bottom Layer w0.5: XP1.2 23.71,-13.96 20.4,-10.65 20.4,-0.375 v1(24.425,3.65)
MOSI: DD2.1 XP1.1 | length 42.8
  Top Layer w0.3: v1(26.575,4.725) 26.825,4.475 26.825,0.084 28.159,-1.25 DD2.1
  Bottom Layer w0.75: XP1.1 21.17,-15.795 18.675,-13.3 18.675,0.35 22.9,4.575 24.808,4.575 24.833,4.55 26.4,4.55 v1(26.575,4.725)
NetC4_1: C4.1 DA1.8 L1.1 VD1.2
NetC4_2: C4.2 DA1.1 | length 3.7
  Top Layer w0.75: C4.2 40.2,11.025 41.45,12.275 41.45,13.725
NetC5_1: C5.1 DA1.4 R4.2 R5.1
NetC15_2: C15.2 C16.1 | length 2.2
  Top Layer w0.3: C16.1 45.5,-2.8 C15.2
NetC17_1: C17.1 DA2.8 VD2.2 | length 11.4
  Top Layer w0.75: VD2.2 76.6,9.5 77.475,8.625 C17.1 75.15,7.75 74.3,6.9 DA2.8
NetC18_1: C18.1 DA3.8 VD3.2 | length 11.4
  Top Layer w0.75: VD3.2 76.55,-1.75 77.475,-2.675 77.475,-5.3 C18.1 74.5,-5.3 74.25,-5.55 DA3.8
NetC19_1: C19.1 DA4.8 VD4.2 | length 10.4
  Top Layer w0.75: VD4.2 76.2,-12.5 77.475,-13.775 C19.1 74.7,-15 74.25,-15.45 DA4.8
NetDA1_2: DA1.2 R6.1 | length 2.2
  Top Layer w0.5: DA1.2 43.515,15.365 R6.1
NetHL1_1: HL1.1 R2.1 | length 5.2
  Top Layer w1: R2.1 49.9,-11.5 HL1.1
NetHL2_1: HL2.1 R1.1 | length 9.2
  Top Layer w1: R1.1 51.5,-13.75 52.5,-12.75 HL2.1
NetHL3_1: HL3.1 R3.1 | length 13.3
  Top Layer w1: R3.1 52.9,-16 55,-13.9 HL3.1
NetHL4_1: HL4.1 R24.1 | length 2.5
  Top Layer w1: R24.1 HL4.1
NetR18_2: R18.2 VD5.1 VT1.1 | length 9.8
  Top Layer w0.75: R18.2 86.758,29.035 VD5.1 86.758,33.858 88.027,35.127 VT1.1
NetR19_2: R19.2 VD6.1 VT2.1 | length 7.5
  Top Layer w0.75: R19.2 86.6,19.793 VD6.1 87.577,19.377 88.867,20.667 VT2.1
NetR20_2: R20.2 VD7.1 VT3.1 | length 6.6
  Top Layer w0.75: R20.2 88.008,5.908 VD7.1 90.58,8.75 VT3.1
NetR21_2: R21.2 VD8.1 VT4.1 | length 8.8
  Top Layer w0.75: R21.2 88.258,0.842 VD8.1 88.258,-4.358 89.07,-5.17 VT4.1
NetR22_2: R22.2 VD9.1 VT5.1 | length 9.2
  Top Layer w0.75: R22.2 86.758,-22.842 VD9.1 86.758,-18.542 87.13,-18.17 VT5.1
NetR23_2: R23.2 VD10.1 VT6.1 | length 9.1
  Top Layer w0.75: R23.2 87.1,-26.25 87.1,-28.658 VD10.1 87,-28.758 87,-30 87.71,-30.71 VT6.1
OSC1: C8.2 DD2.8 ZQ1.1 | length 10.6
  Top Layer w0.4: C8.2 ZQ1.1 24.4,-6.85 DD2.8
OSC2: C10.2 DD2.7 ZQ1.3 | length 10.6
  Top Layer w0.3: C10.2 22.245,-4.125 ZQ1.3
  Top Layer w0.4: ZQ1.3 24.18,-6.05 DD2.7
PGND: C1.2 C12.2 C13.2 C14.2 DA2.4 DA3.4 DA4.4 JT1.1 pad.-@1.5,0 pad.-@1.5,2 pad.-@1.5,4 pad.-@1.5,6 pad.-@1.5,8 pad.-@1.5,10 pad.-@1.5,12 pad.-@1.5,-2 pad.-@1.5,-4 pad.-@1.5,-6 pad.-@1.5,-8 pad.-@1.5,-10 pad.-@1.5,-12 pad.-@1.5,-14 pad.-@1.5,-16 pad.-@1.5,-18 pad.-@1.5,-20 pad.-@1.5,-22 pad.-@1.5,-24 pad.-@1.5,-26 pad.-@1.5,-28 pad.-@4,-6 pad.-@4,-8 pad.-@4,-10 pad.-@4,-12 pad.-@4,-16 pad.-@4,-18 pad.-@4,-20 pad.-@4,-22 pad.-@4,-24 pad.-@4,-26 pad.-@4,-28 pad.-@6,-6 pad.-@6,-8 pad.-@6,-16 pad.-@6,-18 pad.-@6,-20 pad.-@6,-22 pad.-@6,-24 pad.-@6,-26 pad.-@6,-28 pad.-@8,-6 pad.-@8,-16 pad.-@8,-18 pad.-@8,-20 pad.-@8,-22 pad.-@10,-16 pad.-@10,-18 pad.-@12,-12 pad.-@12,-14 pad.-@12,-16 pad.-@12,-18 pad.-@14,-16 pad.-@17,-29 pad.-@18,-27 pad.-@19,-29 VD1.1 VT2.3 VT4.3 VT6.3 XS1.9 | length 32.8
  Bottom Layer w0.75: v1(34.65,4.7) v1(31.9,4.7) 31.1,4.7 29.5,3.1 29.5,1.8 30.3,1 35.6,1 35.7,1.1 54.8,1.1
  other v1: 83,-40 85,-40 87,-40 89,-40 91,-40 93,-40 83,-39 85,-39 87,-39 89,-39 91,-39 93,-39 81,-38 83,-38 85,-38 87,-38 89,-38 91,-38 93,-38 89.45,-37.15 90.45,-37.15 91.45,-37.15 92.45,-37.15 93.35,-37.15 88.95,-36.65 81,-36 83,-36 85,-36 87,-36 88.95,-35.15 89.45,-34.65 90.45,-34.65 91.45,-34.65 92.45,-34.65 93.35,-34.65 83,-34 85,-34 87,-34 83,-32 81.586,-30.586 54,-30 56,-30 58,-30 60,-30 62,-30 64,-30 66,-30 68,-30 70,-30 72,-30 74,-30 76,-30 78,-30 58,-28 60,-28 62,-28 64,-28 66,-28 68,-28 70,-28 72,-28 74,-28 76,-28 78,-28 58,-26 66,-26 68,-26 70,-26 72,-26 61.5,-25.769 62.25,-25.769 63,-25.769 59.25,-25.019 65,-25.019 59.25,-24.269 65,-24.269 58,-24 66,-24 68,-24 70,-24 72,-24 61.5,-15.519 62.25,-15.519 63,-15.519 59.25,-14.769 65,-14.769 59.25,-14.019 65,-14.019 89.5,-11.5 90.5,-11.5 91.5,-11.5 92.5,-11.5 93.4,-11.5 89,-11 89,-9.5 89.5,-9 90.5,-9 91.5,-9 92.5,-9 93.4,-9 61.5,-4.25 62.25,-4.25 63,-4.25 59.25,-3.5 65,-3.519 65,-2.769 59.25,-2.75 58.55,3.825 28,4 57.9,4.5 59.1,4.5 20,5 21,5 28,5 29,5 19,6 20,6 21,6 22,6 23,6 24,6 25,6 26,6 27,6 28,6 29,6 30,6 31,6 19,7 20,7 21,7 22,7 23,7 24,7 25,7 26,7 27,7 28,7 29,7 30,7 31,7 19,8 20,8 21,8 22,8 23,8 24,8 25,8 26,8 27,8 28,8 29,8 30,8 31,8 14,10 15,10 14,11 15,11 89.33,14.337 90.33,14.337 91.33,14.337 92.33,14.337 93.23,14.337 88.83,14.837 88.83,16.337 89.33,16.837 90.33,16.837 91.33,16.837 92.33,16.837 93.23,16.837
  other v2: 21,-30 22,-30 23,-30 24,-30 25,-30 26,-30 27,-30 28,-30 29,-30 30,-30 31,-30 32,-30 33,-30 34,-30 35,-30 36,-30 21,-29 22,-29 23,-29 24,-29 25,-29 26,-29 27,-29 28,-29 29,-29 30,-29 31,-29 32,-29 33,-29 34,-29 35,-29 36,-29 21,-28 22,-28 23,-28 24,-28 25,-28 26,-28 27,-28 28,-28 29,-28 30,-28 31,-28 32,-28 33,-28 34,-28 35,-28 36,-28 37,-28 37,-27
RESET_MPU: DD2.4 R7.1 XP1.4 | length 27.8
  Top Layer w0.3: R7.1 27.363,-3 28.013,-3.65 DD2.4
  Top Layer w0.4: DD2.4 30.25,-3.65 v1(30.5,-3.4)
  Bottom Layer w0.5: XP1.4 28.79,-11.915 27.6,-10.725 27.6,-5.7 29.9,-3.4 v1(30.5,-3.4)
RxD: DD1.1 DD2.9 | length 32.1
  Top Layer w0.4: DD1.1 16.35,5.622 v1(16.35,6.95) ; v1(16.325,-3.65) 16.3,-3.675 16.3,-9.925 16.775,-10.4 23.375,-10.4 26.125,-7.65 DD2.9
  Bottom Layer w0.4: v1(16.325,-3.65) 16.325,6.925 v1(16.35,6.95)
SCK: DD2.3 XP1.3 | length 34.1
  Top Layer w0.3: v1(25.025,1.85) 25.025,0.187 27.962,-2.75 28.65,-2.75 DD2.3
  Bottom Layer w0.5: v1(25.025,1.85) 24.275,1.1 24.275,-8.85 26.25,-10.825 XP1.3
TxD: DD1.4 DD2.10 | length 35.3
  Top Layer w0.4: v1(12.425,-3.4) 12.425,-8.525 15.2,-11.3 23.95,-11.3 26.8,-8.45 DD2.10 ; v1(12.45,6.825) 12.45,5.592 DD1.4
  Bottom Layer w0.4: v1(12.425,-3.4) 12.425,6.8 v1(12.45,6.825)
TxD_EN: DD1.2 DD1.3 DD2.19 | length 74.4
  Top Layer w0.3: v1(14.975,-13.875) 15.25,-13.875 18.35,-16.975 18.35,-24.8 20.2,-26.65 35.175,-26.65 37.95,-23.875 37.95,-14.3 36.1,-12.45 DD2.19
  Top Layer w0.5: DD1.3 13.75,7.2 v1(14.275,7.725) 15.02,6.98 DD1.2
  Bottom Layer w0.3: v1(14.275,7.725) 14.975,7.025 v1(14.975,-13.875)
U: C17.2 DA2.6 R14.2 VT1.3 VT2.2 XP2.1 | length 82.2
  Top Layer w0.75: DA2.6 76.585,2.46 77.5,3.375 C17.2 79.2,4.55 79.7,5.05 79.7,12.1 ; VT2.2@100.427,20.2 VT2.2
  Top Layer w1: 79.7,12.1 82.2,14.6 82.2,23.4 83.505,24.705 90.9,24.705 ; v1(94.1,30.175) 91.128,30.175 VT1.3 90.9,29.947 90.9,24.705 ; VT2.2 98.773,18.127 92.195,24.705 90.9,24.705
  Bottom Layer w1: R14.2 79.925,26.25 83.85,30.175 v1(94.1,30.175)
V: C18.2 DA3.6 R15.2 VT3.3 VT4.2 XP2.2 | length 95.4
  Top Layer w0.75: DA3.6 77.38,-8.48 C18.2 80.925,-8.5 83.275,-6.15 83.275,1.39 84.885,3 VT3.3
  Top Layer w1: VT3.3 v1(94.2,3)
  Top Layer w2: VT3.3 91.25,1.05 95.8,-3.5 95.8,-6.1 97.41,-7.71 VT4.2 109.88,-0.5 XP2.2
  Bottom Layer w1: R15.2 81.9,23.75 87.2,18.45 87.2,4.65 88.875,2.975 94.175,2.975 v1(94.2,3)
VCC: C1.1 C2.2 C3.2 C12.1 C13.1 C14.1 DA1.5 DA1.7 DA2.1 DA3.1 DA4.1 VD2.1 VD3.1 VD4.1 VT1.2 VT3.2 VT5.2 XS1.1 | length 133.9
  Top Layer w0.75: C14.1 63.519,-16.5 DA4.1 69.3,-16.5 69.992,-15.808 VD4.1 69.992,-11.008 71.3,-9.7 71.3,-7.2 ; C13.1 63.829,-5.94 DA3.1 70.04,-5.94 71.3,-7.2 ; C12.1 63.5,5 DA2.1 ; VD3.1 70.45,-1.75 71.3,-2.6 ; 78.8,27.1 78.8,14.885 76.465,12.55 70.965,12.55 69.492,11.077 VD2.1 69.492,7.992 68.738,7.238 DA2.1 ; DA2.1 69.9,5 71.3,3.6 71.3,-2.6 ; 71.3,-7.2 71.3,-2.6
  Top Layer w1.5: 36.1,18.3 36.1,21.8 37.5,23.2 45.4,23.2 48.9,19.7 55.4,19.7 58.3,22.6 58.3,27.5 59.3,28.5 77.4,28.5
  other v1: 98.75,-26.75 99.75,-26.75 100.75,-26.75 101.75,-26.75 102.75,-26.75 103.75,-26.75 104.75,-26.75 105.75,-26.75 106.75,-26.75 97.42,-26.663 107.75,-26.297 97.42,-25.663 107.75,-25.297 97.42,-24.663 107.75,-24.297 97.42,-23.663 107.75,-23.297 97.42,-22.663 107.75,-22.297 97.42,-21.663 107.75,-21.297 97.42,-20.663 107.75,-20.297 97.42,-19.663 107.75,-19.297 97.42,-18.663 107.75,-18.297 97.42,-17.663 107.75,-17.297 97.42,-16.663 107.75,-16.297 97.42,-15.663 107.75,-15.297 97.42,-14.663 98.5,-14.5 99.5,-14.5 100.5,-14.5 101.5,-14.5 102.5,-14.5 103.5,-14.5 104.5,-14.5 105.5,-14.5 107,-14.5 97.42,0.587 99.08,0.587 100.08,0.587 101.08,0.587 102.08,0.587 103.08,0.587 104.08,0.587 105.08,0.587 106.08,0.587 107.75,0.953 97.42,1.587 107.75,1.953 97.42,2.587 107.75,2.953 97.42,3.587 107.75,3.953 97.42,4.587 107.75,4.953 97.42,5.587 107.75,5.953 97.42,6.587 107.75,6.953 97.42,7.587 107.75,7.953 97.42,8.587 107.75,8.953 97.42,9.587 107.75,9.953 97.42,10.587 107.75,10.953 99,11.34 100,11.34 101,11.34 102,11.34 103,11.34 104,11.34 105,11.34 106,11.34 97.34,27 99,27 100,27 101,27 102,27 103,27 104,27 105,27 106,27 107.5,27 97.34,28 107.5,28 97.34,29 107.5,29 97.34,30 107.5,30 97.34,31 107.5,31 97.34,32 107.5,32 97.34,33 107.5,33 97.34,34 107.5,34 97.34,35 107.5,35 97.34,36 107.5,36 97.34,37 107.5,37 97.34,38 107.5,38 97.34,39 99,39 100,39 101,39 102,39 103,39 104,39 105,39 106,39 107.5,39
VS_3: C19.2 DA4.6 R16.2 VT5.3 VT6.2 XP2.3 | length 75
  Top Layer w0.75: DA4.6 76.66,-19.04 C19.2 79.525,-18.2 v1(79.55,-18.225)
  Bottom Layer w1: R16.2 79.475,21 82.025,18.45 82.025,-17.8 87.55,-23.325 ; v1(79.55,-18.225) 79.55,-20.475 82.4,-23.325 87.55,-23.325 ; v1(93.4,-23.325) 87.55,-23.325
pads on no net: DD2.11 DD2.12 DD2.15 DD2.23 DD2.30 DD2.31 DD2.32 DD2.33 DD2.34 DD2.40 DD2.41 DD2.43 DD2.44 XS1.2 XS1.4 XS1.6 XS1.7 XS1.8 XS1.M

## Polygon pours and split planes (outlines as drawn)
PGND on Top Layer "Top Overlay-No Net" (solid, remove dead copper, pour order 86): 0.541,14 0.541,-28.415 2.5,-30.374 35.626,-30.374 38,-28 38,-18 34,-14 16,-14 11,-9 11,4 10,5 6,5 4,7 4,14
PGND on Top Layer "Top Overlay-No Net" (solid, remove dead copper, pour order 44): 38.5,-16.5 38.5,-28 56,-45.5 90.5,-45.5 94.5,-41.5 94.5,-34 93.5,-33 86,-33 80,-27 75,-27 72.5,-24.5 72.5,-21 71,-19.5 65,-19.5 62.5,-22 55.5,-22 50,-16.5
PGND on Top Layer "Top Overlay-No Net" (solid, remove dead copper, pour order 20): 11.75,9.525 15.975,13.75 21.1,13.75 21.625,13.225 21.625,9.45 21.85,9.225 30.325,9.225 32.3,7.25 35.8,7.25 35.9,7.15 35.9,3.25 20.525,3.25 17.825,5.95 17.825,7.75 17.375,8.2 11.75,8.2
DGND on Top Layer "DGND_L01_P082" (solid, remove dead copper, pour order 82): 55.5,18.5 55.5,14.4 56.3,13.6 59.5,13.6 60.1,14.2 60.1,16.2 60.7,16.8 64.8,16.8 65.5,17.5 65.5,19.35 66.2,20.05 69.15,20.05 69.7,20.6 69.7,25.7 69.3,26.1 60,26.1 59.2,25.3 59.2,22.2
DGND on Top Layer "DGND_L01_P080" (solid, remove dead copper, pour order 80): 34.8,15.9 36.6,15.9 37.3,15.2 37.3,13.967 37.667,13.6 40.3,13.6 40.6,13.9 40.6,15.8 40.7,15.9 42.2,15.9 42.6,16.3 42.6,17.2 42.3,17.5 40.6,17.5 39.9,18.2 39.9,21.7 39.3,22.3 37.9,22.3 37.1,21.5 37.1,17.1 37,17 34.8,17
PGND on Top Layer "PGND_L01_P054" (solid, remove dead copper, pour order 54): 54,4.5 55.75,4.5 57.25,3 57.25,0.25 57.5,0 58,0 58.75,0.75 63.25,0.75 63.25,6.5 54,6.5
5V_VCC on Top Layer "Top Overlay-No Net" (solid, remove dead copper, pour order 14): 43.05,7.05 43.05,4.575 44.075,3.55 51.85,3.55 53.1,2.3 53.1,-0.875 52.625,-1.35 52.625,-3.475 53.175,-4.025 54.1,-4.025 57.1,-1.025 57.1,2.375 55.4,4.175 52.95,4.175 50.075,7.05
5V_VCC on Top Layer "Top Overlay-No Net" (solid, remove dead copper, pour order 76): 43.5,19.625 43.725,19.4 44.65,19.4 45.4,18.65 45.4,14.3 47.7,12 56.191,12 59.991,8.2 62.4,8.2 63.1,8.9 63.1,11.25 60.95,13.4 56.1,13.4 55.1,14.4 55.1,17.9 54.5,18.5 47.6,18.5 45.4,20.7 43.5,20.7
DGND on Top Layer "Top Overlay-No Net" (solid, remove dead copper, pour order 28): 65,10 66,9 66,6 65.5,5.5 52.5,5.5 50.963,7.037 50.963,10.963 51.5,11.5 55.5,11.5 57,10
AVCC on Top Layer "Top Overlay-No Net" (solid, remove dead copper, pour order 0): 45.5,-0.5 49,-0.5 50,-1.5 50,-3.5 50.5,-4 52.5,-4 52.5,2.528 52.028,3 46,3 45.5,2.5
VCC on Top Layer "Top Overlay-No Net" (solid, remove dead copper, pour order 8): 36.625,16 36.625,14.675 32.225,14.675 31.8,14.25 15.775,14.25 11,9.475 11,6.56 9.89,5.45 7.5,5.45 4.725,8.225 4.725,17.05 7.4,19.725 25,19.725 28.725,16
NetC5_1 on Top Layer "Top Overlay-No Net" (solid, remove dead copper, pour order 10): 40.35,21.125 40.35,18 40.825,17.525 42.35,17.525 43.125,16.75 44.15,16.75 44.525,17.125 44.525,18.925 44.2,19.25 43.7,19.25 43.175,19.775 43.175,21.125
NetC4_1 on Top Layer "Top Overlay-No Net" (solid, remove dead copper, pour order 16): 37.8,14.4 37.8,9.85 38.375,9.275 41,9.275 41.45,8.825 41.45,5.05 41.025,4.625 38.975,4.625 38.1,5.5 38.1,6.975 36.95,8.125 32.25,8.125 31.85,8.525 31.85,14.4
DGND on Top Layer "Top Overlay-No Net" (solid, remove dead copper, pour order 18): 21.975,13.825 30.875,13.825 31.575,13.125 31.575,10.075 31.1,9.6 21.975,9.6
VCC on Top Layer "Top Overlay-No Net" (solid, remove dead copper, pour order 22): 25,19.725 28.85,15.875 36.4,15.875 36.95,16.425 36.95,19.7
VS_3 on Top Layer "Top Overlay-No Net" (solid, remove dead copper, pour order 4): 89,-25.5 92,-25.5 95.5,-29 95.5,-39 96.5,-40 114,-40 116.5,-37.5 116.5,-3.5 114,-1 110,-1 107.5,-3.5 107.5,-27 98.5,-27 92,-20.5 89,-20.5
VCC on Top Layer "Top Overlay-No Net" (solid, remove dead copper, pour order 36): 96.5,-14 107.525,-14 108.286,-14.761 108.286,-27.214 107.95,-27.55 96.5,-27.55
PGND on Top Layer "Top Overlay-No Net" (solid, remove dead copper, pour order 40): 55,-6 59.5,-1.5 64,-1.5 67.5,2 71,2 71,-0.734 70.234,-1.5 69,-1.5 69,-6.7 65.2,-10.5 59,-10.5 59,-10
PGND on Top Layer "Top Overlay-No Net" (solid, remove dead copper, pour order 42): 65,-11.5 67.5,-9 70,-9 70.5,-9.5 69.23,-10.77 69.23,-15.77 69,-16 63.253,-16 62.5,-16.753 60.5,-16.753 60.5,-18.5 61,-19 63.5,-19 63.5,-19.5 62.5,-20.5 56.5,-20.5 54,-18 54,-16 58.5,-11.5
PGND on Top Layer "Top Overlay-No Net" (solid, remove dead copper, pour order 50): 82.67,-6.437 84.57,-6.437 89.57,-6.437 96.77,-6.437 98.77,-8.437 98.77,-16.337 82.495,-16.337
5V_VCC on Top Layer "5V_VCC_L01_P060" (solid, remove dead copper, pour order 60): 29,1 29,-11 41,-11 41,1
DGND on Top Layer "DGND_L01_P084" (solid, remove dead copper, pour order 84): 0.541,15 0.541,28.75 cw(c0.641,28.849) 0.5,28.849 0.5,29.4 cw(c1.466,29.4) 0.783,30.083 1.2,30.5 cw(c1.683,30.017) 1.683,30.7 2.9,30.7 53.6,30.709 53.6,20.4 53.5,20.3 48.6,20.3 45.4,23.5 36.8,23.5 33,19.7 32.8,19.5 7.4,19.5 4.8,16.9 4.8,15
U on Top Layer "Top Overlay-No Net" (solid, remove dead copper, pour order 2): 98,12.302 98.302,12 107.5,12 109.5,10 109.5,1 110.5,0 114.5,0 115.5,1 115.5,24 113.5,26 98,26
VCC on Top Layer "Top Overlay-No Net" (solid, remove dead copper, pour order 32): 96,13 96,-1 109,-1 109,13
PGND on Top Layer "Top Overlay-No Net" (solid, remove dead copper, pour order 48): 82.5,19.4 84.4,19.4 89.4,19.4 96.6,19.4 98.6,17.4 98.6,9.5 82.325,9.5
DGND on Top Layer "DGND_L01_P072" (solid, remove dead copper, pour order 72): 11.5,0.5 11.5,-1.5 12.7,-1.5 14.2,-3 16.6,-3 17.6,-4 17.6,-8.5 18.8,-9.7 20.9,-9.7 21.4,-9.2 21.4,-3.7 22,-3.1 23.1,-3.1 25.7,-5.7 26.5,-5.7 26.5,-5.689 27.201,-4.987 27.201,-3.426 23.275,0.5
VCC on Top Layer "Top Overlay-No Net" (solid, remove dead copper, pour order 30): 76,44 114,44 116,42 116,26 76,26
AGND on Top Layer "Top Overlay-No Net" (solid, remove dead copper, pour order 26): 77.5,16 77.5,14.5 76,13 62,13 60.5,14.5 60.5,16
DGND on Bottom Layer "Top Overlay-No Net" (solid, remove dead copper, pour order 78): 54,8 61,15 61,19.5 60.5,20 60,20 51.5,11.5 51.5,10 53.7,7.7
DGND on Bottom Layer "Top Overlay-No Net" (solid, remove dead copper, pour order 74): 23.7,13.2 23.7,9.5 36.291,9.5 37.4,10.609 37.4,13.2
DGND on Bottom Layer "DGND_L02_P068" (solid, remove dead copper, pour order 68): 0,15 31,15 35,11 35,6 34,5 34,0 46,0 54,8 54,32 53,33 0,33
PGND on Bottom Layer "PGND_L02_P066" (solid, remove dead copper, pour order 66): 10,-2.43 10,2 11,3 30,3 34,7 34,11 31,14 0,14 0,-2
PGND on Bottom Layer "PGND_L02_P062" (solid, remove dead copper, pour order 62): 37.5,-32.5 0,-32.5 0,5 10,5 10,-15 22.5,-27.5 37.5,-27.5
VCC on Bottom Layer "Top Overlay-No Net" (solid, remove dead copper, pour order 38): 95.9,45 95.9,-46 120.5,-46 120.5,45
DGND on Bottom Layer "DGND_L02_P056" (solid, remove dead copper, pour order 56): 29,0 29,-10 40,-10 40,0
PGND on Bottom Layer "Top Overlay-No Net" (solid, remove dead copper, pour order 52): 54,43.75 54,-31.25 97,-31.25 97,43.75
PGND on Bottom Layer "PGND_L02_P070" (solid, remove dead copper, pour order 70): 80.5,-31 80.5,-39.3 81.9,-40.7 95.5,-40.7 95.5,-31

## Keep-outs
Keep-Out Layer:
  lines w0.2: 0,-28.75 ccw(c2.5,-28.75) 2.5,-31.25 77.5,-31.25 cw(c77.5,-33.75) 80,-33.75 80,-38.75 ccw(c82.5,-38.75) 82.5,-41.25 112.5,-41.25 ccw(c112.5,-38.75) 115,-38.75 115,41.25 ccw(c112.5,41.25) 112.5,43.75 82.5,43.75 ccw(c82.5,41.25) 80,41.25 80,33.75 cw(c77.5,33.75) 77.5,31.25 5,31.25 2.5,31.25 ccw(c2.5,28.75) 0,28.75 0,-28.75

## Silkscreen, mask and mechanical layers (free items; w line width, h text height)
Top Overlay:
  circle w0.8: c12.5,25 r4
  circle w0.8: c12.5,-25 r4
  circle w0.8: c52.5,-25 r4
  circle w0.8: c52.5,25 r4
Board:
  lines w0.2: 0,-28.75 ccw(c2.5,-28.75) 2.5,-31.25 77.5,-31.25 cw(c77.5,-33.75) 80,-33.75 80,-38.75 ccw(c82.5,-38.75) 82.5,-41.25 112.5,-41.25 ccw(c112.5,-38.75) 115,-38.75 115,41.25 ccw(c112.5,41.25) 112.5,43.75 82.5,43.75 ccw(c82.5,41.25) 80,41.25 80,33.75 cw(c77.5,33.75) 77.5,31.25 5,31.25 2.5,31.25 ccw(c2.5,28.75) 0,28.75 0,-28.75

## Text inside footprints (layer, text, board x,y; h text height)
XP1: Top Overlay "MOSI" at 21.57,-22.8 h1 r90; Top Overlay "MISO" at 24.37,-22.8 h1 r90; Top Overlay "SCK" at 26.87,-22.9 h1 r90; Top Overlay "GND" at 34.32,-22.9 h1 r90; Top Overlay "VCC" at 31.87,-22.85 h1 r90; Top Overlay "RESET" at 29.37,-22.95 h1 r90